# Altium PCB PCB1B.PcbDoc
Units mm, origin at the board's own origin, x right, y up, seen from the top; angles counter-clockwise.
Board outline 33.02 x 33.02 mm, 2 copper layers (Top Layer, Bottom Layer); 14 components, 12 nets, 65 pads, 2 vias.
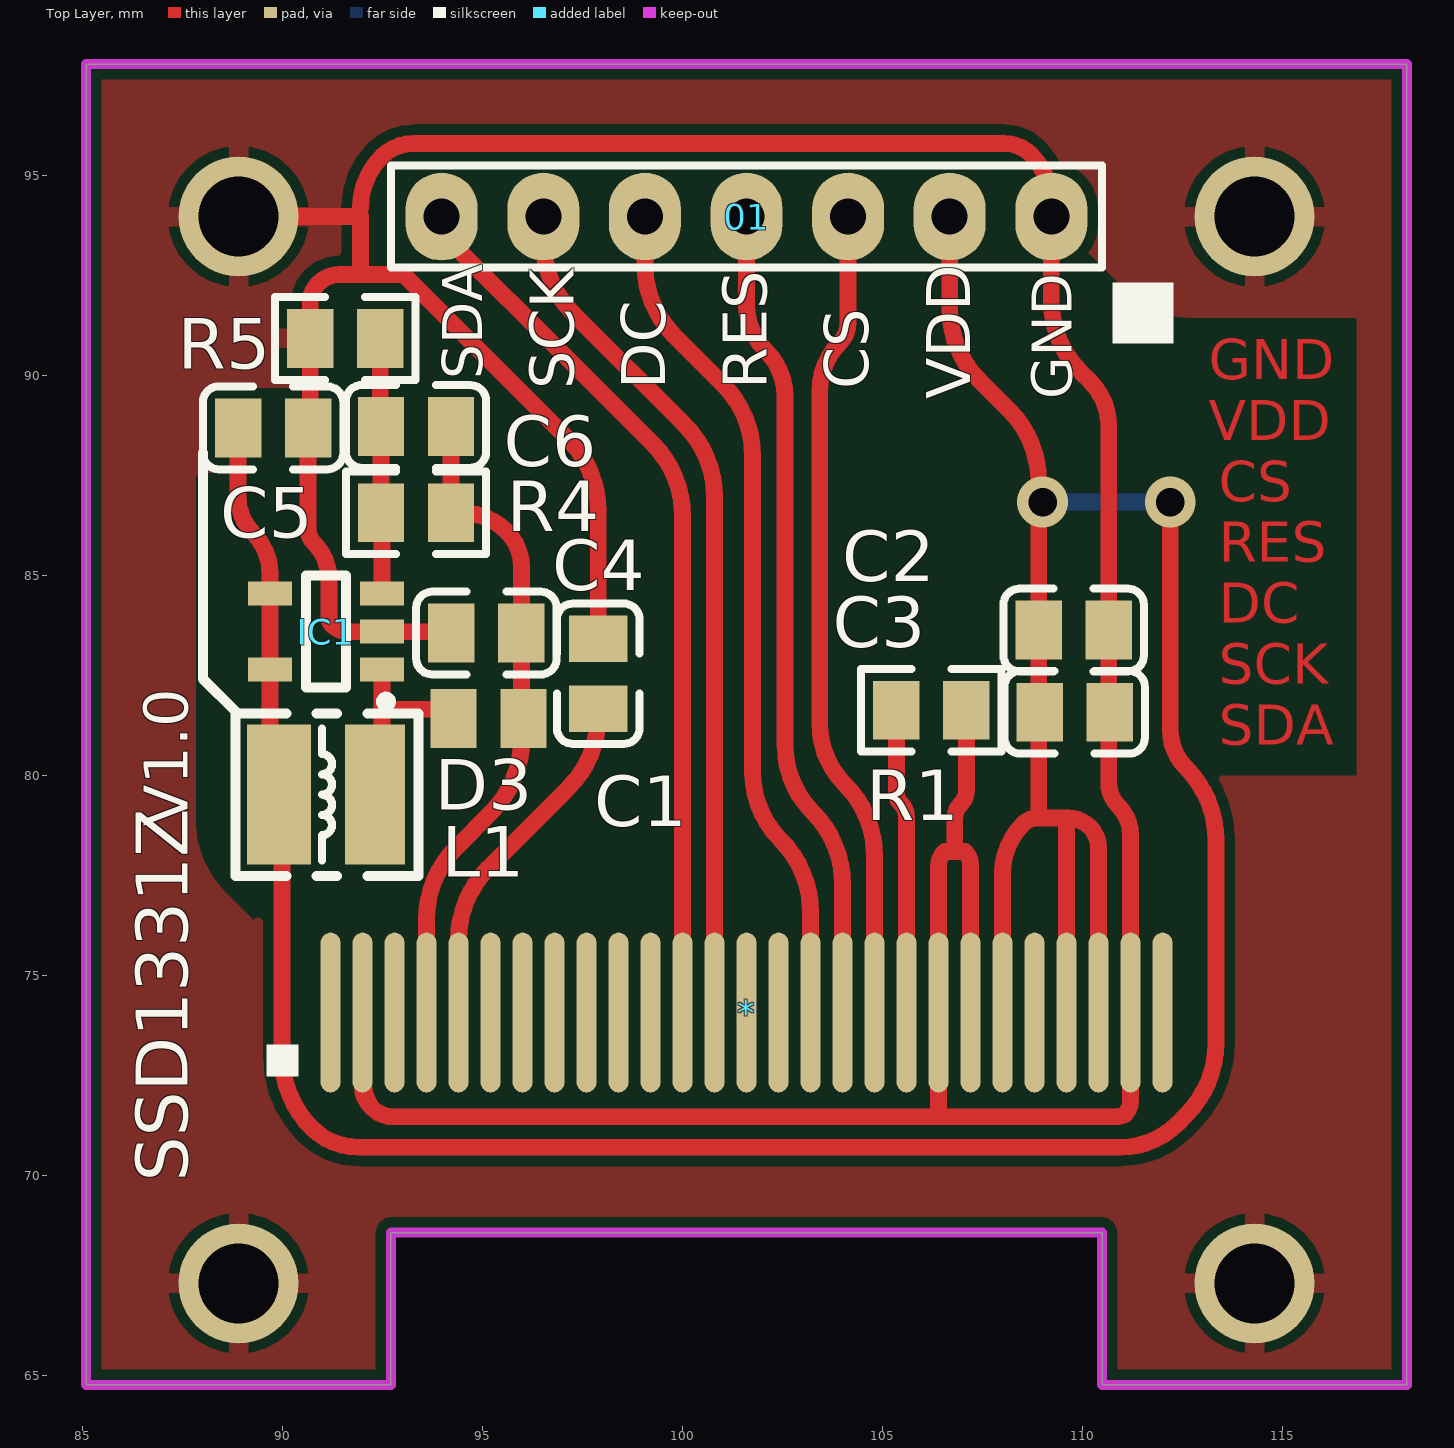
[diagram p0: Top Layer view]
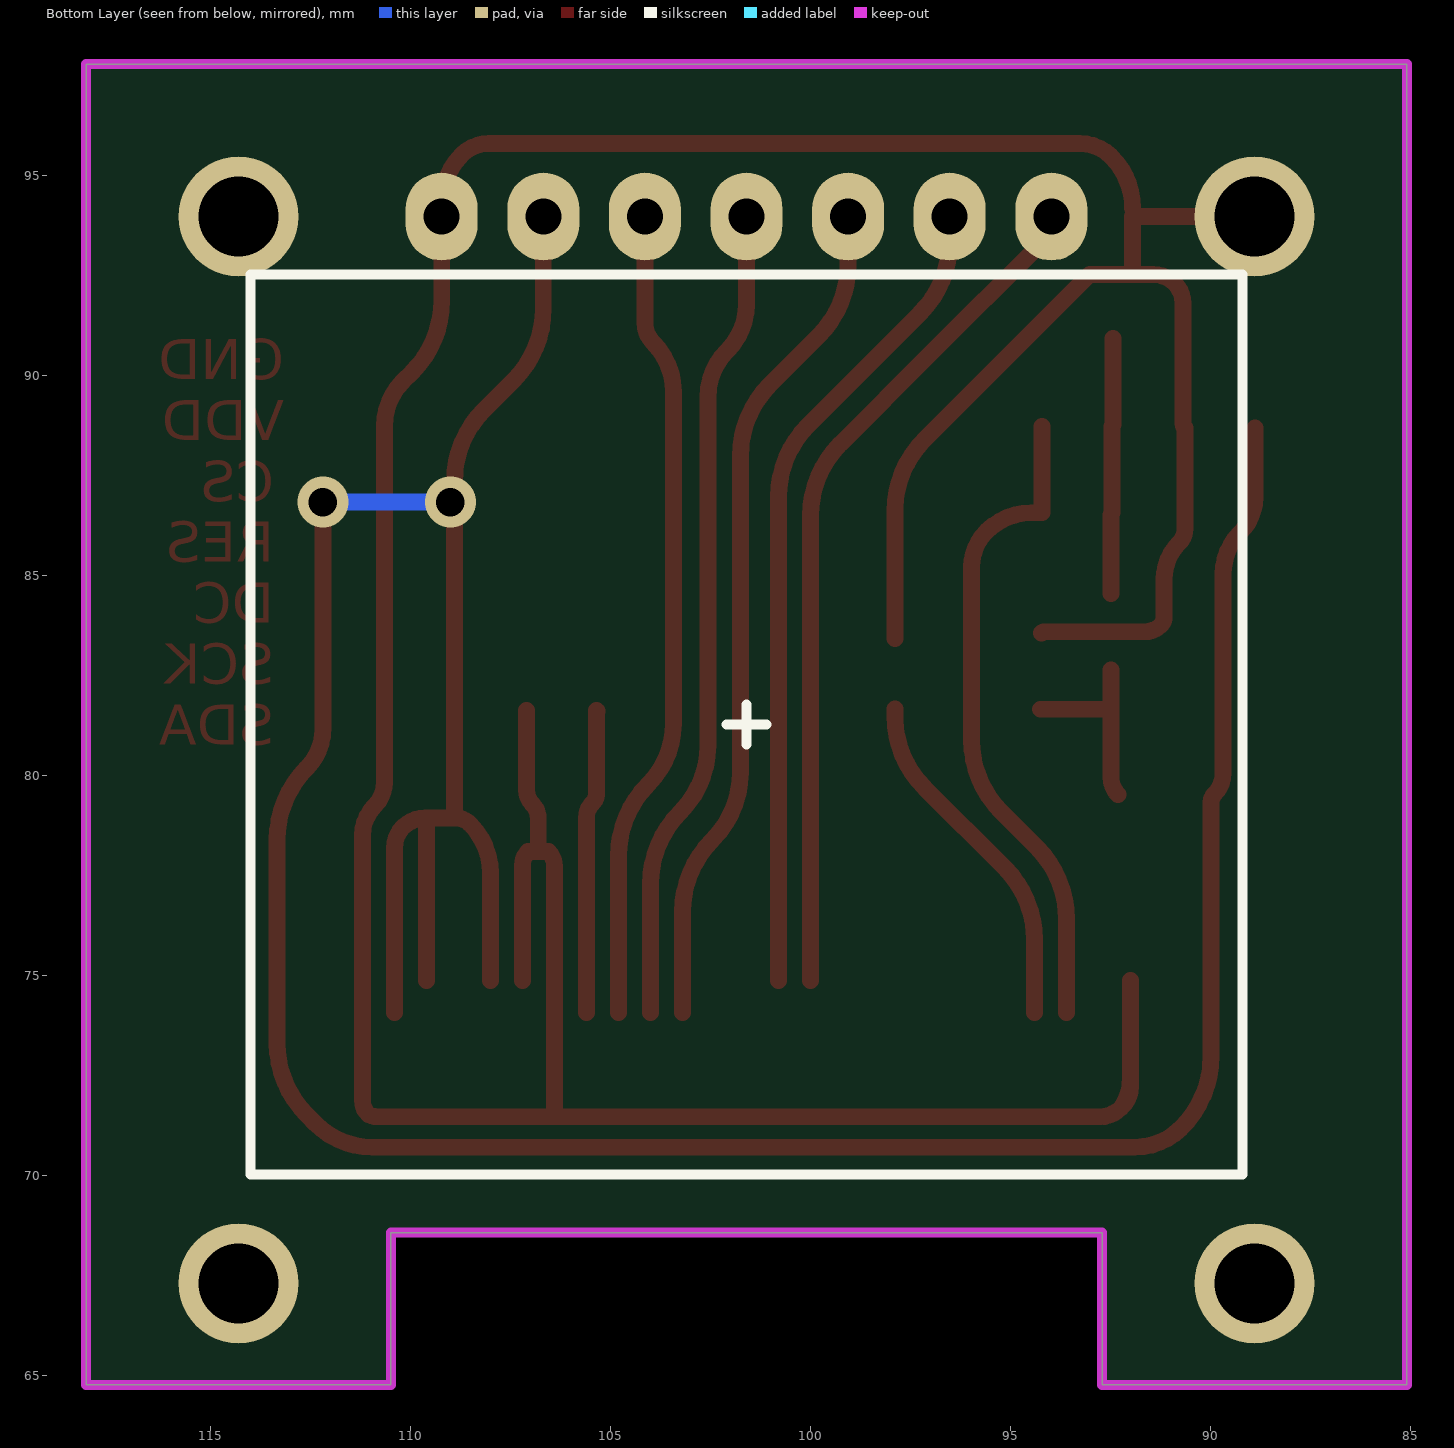
[diagram p1: Bottom Layer view, seen from below]
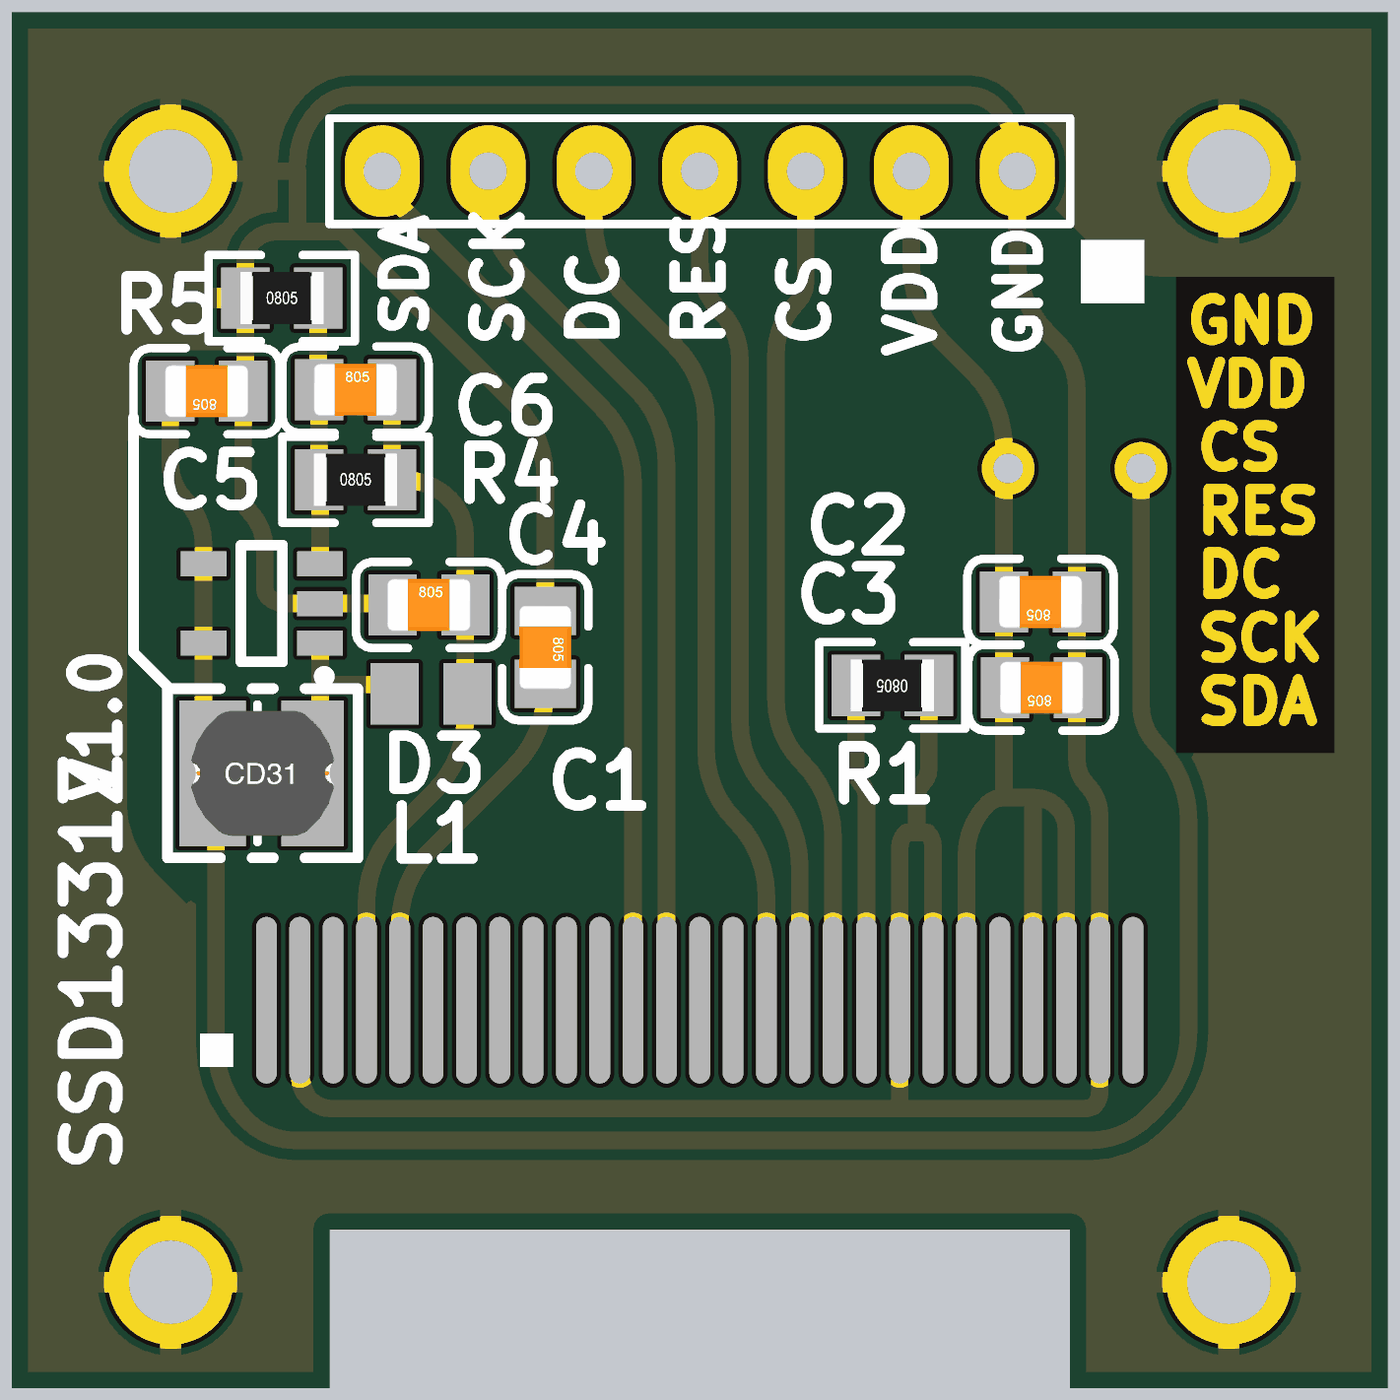
[diagram p2: 3D render of the assembled board from above, using the file's embedded part models]

## Layer stack, top to bottom
Top Solder: solder mask 0.0102, Solder Resist, Dk 3.5
Top Layer: signal copper 0.0356
Dielectric 1: dielectric 0.32, FR-4, Dk 4.8
Bottom Layer: signal copper 0.0356
Bottom Solder: solder mask 0.0102, Solder Resist, Dk 3.5

## Board outline
85.09,64.77 85.09,97.79 118.11,97.79 118.11,64.77 110.49,64.77 110.49,68.58 92.71,68.58 92.71,64.77

## Design rules (kind name [scope] priority, off if disabled: settings)
Clearance [All] p1: gap=0.254
ComponentClearance [All] p1 off: gap=0.254 collisioncheckmode=3 verticalgap=0.254 showdistances=FALSE
PlaneConnect [All] p1: planeconnectstyle=Relief reliefexpansion=0.508 reliefentries=4 reliefconductorwidth=0.5 reliefairgap=0.254
PolygonConnect [All] p1: connectstyle=Relief reliefconductorwidth=0.5 reliefentries=4 polygonreliefangle="90 Angle" airgapwidth=0.254
RoutingVias [All] p1: holewidth=0.711 width=1.27 viastyle="Through Hole" minholewidth=0.711 minwidth=1.27 maxholewidth=0.711 maxwidth=1.27
SolderMaskExpansion [All] p1: expansion=0.102
Width [All] p1: maxlimit=0.5 minlimit=0.42 preferedwidth=0.42
28 further rules are at their usual default settings.

## Classes and differential pairs
component class Sheet1: C1 C4 C5 C6 D3 IC1 L1 R1 R4 R5

## Components (designator, comment, footprint, x,y, rotation, side; value= is the part's Value field where it differs from the comment)
01 "Header 7" HDR1X7 109.22,93.98 r180 top locked
* "VGM096064A2F02" VGM096064A2F02 101.6,81.28 r0 top locked
C1 "Cap" LC-0805_C 97.892,82.55 r270 top
C2 "Cap" LC-0805_C 109.779,83.642 r180 top
C3 "Cap" LC-0805_C 109.804,81.585 r180 top
C4 "Cap" LC-0805_C 95.098,83.566 r0 top
C5 "Cap" LC-0805_C 89.764,88.697 r180 top
C6 "Cap" LC-0805_C 93.337,88.732 r0 top
D3 "SS24" LC-0805 95.148,81.432 r0 top
IC1 "PT1305" LC-SOT-23-5 91.087,83.602 r0 top
L1 "22uh" CD31 91.11,79.527 r0 top
R1 "Res2" LC-0805_R 106.223,81.636 r180 top
R4 "Res1" LC-0805_R 93.337,86.573 r0 top
R5 "Res1" LC-0805_R 91.567,90.932 r0 top

## Footprints (in the part's own frame and the unit in brackets; to place one, negate y for a bottom-side part, rotate by r counter-clockwise, add the part's x,y. Pads: shape width x height; smd on the part's side, far side on the other; paste and mask are expansions set on the pad)
CD31 [mm] "3.5*3*1mm（长宽高）"
  rect 1.6x3.5 smd: 1(-1.2,0)
  rect 1.5x3.5 smd: 2(1.2,0)
  silkscreen extent -2.29,-2.03 2.29,2.03, body extent -1.72,-1.5 1.72,1.5, height 1.2
HDR1X7 [mm] "Connector; Header; 7 Position"
  oval 1.8x2.2 hole 0.9: 1(0,0) 2(2.54,0) 3(5.08,0) 4(7.62,0) 5(10.16,0) 6(12.7,0) 7(15.24,0)
  silkscreen extent -1.27,-1.27 16.51,1.27
LC-0805 [mm]
  rect 1.16x1.47 smd: 1(-0.875,0) 2(0.875,0)
LC-0805_C [mm]
  rect 1.16x1.47 smd: 1(-0.875,0) 2(0.875,0)
  silkscreen extent -1.76,-1.04 1.76,1.04, body extent -1,-0.62 1,0.63, height 0.77
LC-0805_R [mm]
  rect 1.16x1.47 smd: 1(-0.875,0) 2(0.875,0)
  silkscreen extent -1.76,-1.04 1.76,1.03, body extent -1,-0.62 1,0.63, height 0.49
LC-SOT-23-5 [mm]
  rect 1.1x0.6 smd: 1(1.4,-0.95) 2(1.4,0) 3(1.4,0.95) 4(-1.4,0.95) 5(-1.4,-0.95)
  silkscreen extent -0.5,-1.87 1.63,1.4
VGM096064A2F02 [mm]
  oval 0.5x4 smd: 1(-10.4,-7.2) 2(-9.6,-7.2) 3(-8.8,-7.2) 4(-8,-7.2) 5(-7.2,-7.2) 6(-6.4,-7.2) 7(-5.6,-7.2) 8(-4.8,-7.2) 9(-4,-7.2) 10(-3.2,-7.2) 11(-2.4,-7.2) 12(-1.6,-7.2) 13(-0.8,-7.2) 14(0,-7.2) 15(0.8,-7.2) 16(1.6,-7.2) 17(2.4,-7.2) 18(3.2,-7.2) 19(4,-7.2) 20(4.8,-7.2) 21(5.6,-7.2) 22(6.4,-7.2) 23(7.2,-7.2) 24(8,-7.2) 25(8.8,-7.2) 26(9.6,-7.2) 27(10.4,-7.2)
  silkscreen extent -12,-8.8 -11.2,-8, body extent -12.4,-11.3 12.4,11.2, height 2

## Part data
01: "Header, 7-Pin"
C1 C2 C3 C4 C5 C6: "Capacitor"
D3: "肖特基二极管"
L1: library part Inductor
R1 R4 R5: "Resistor"

## Free pads (board coordinates)
  round 3 hole 2: 0(88.9,67.31) 0(88.9,93.98) 0(114.3,67.31) 0(114.3,93.98)

## Via types
v1: diameter 1.27, hole 0.711, Top Layer to Bottom Layer, 2 vias

## Nets (pads, with @x,y where several pads share a name; then routed paths per layer and width w, separated by ;. In a path a pad name is that pad's centre, name@x,y a point inside that pad or via, vN(x,y) a via of type N, cw(c..) or ccw(c..) an arc to the next point about the centre after c; other vN are vias at no path point)
CS: 01.3 *.18 | length 20.5
  Top Layer w0.42: 01.3 104.14,91.321 cw(c103.446,91.321) 103.937,90.83 ccw(c105.163,89.604) 103.429,89.604 103.429,81.303 ccw(c105.57,81.303) 104.056,79.789 cw(c102.26,77.993) 104.8,77.993 *.18
DC: 01.5 *.16 | length 21.2
  Top Layer w0.42: 01.5 99.06,92.785 ccw(c101.6,92.785) 99.804,90.989 101.008,89.784 cw(c99.212,87.988) 101.752,87.988 101.752,80.091 ccw(c104.155,80.091) 102.456,78.392 cw(c100.66,76.596) 103.2,76.596 *.16
GND: 01.1 *.2 *.20 *.21 *.26 C1.1 C2.1 C3.1 C4.1 C5.1 IC1.2 pad.0 R1.1 R5.1 | length 108.8
  Top Layer w0.42: pad.0@88.9,93.98 91.737,93.98 ; 91.948,93.98 91.948,92.532 ; 91.948,94.191 cw(c93.769,94.191) 92.481,95.479 cw(c93.279,94.681) 93.279,95.809 108.037,95.809 cw(c108.037,94.855) 108.712,95.529 cw(c107.486,94.303) 109.22,94.303 01.1 109.22,91.883 ccw(c111.76,91.883) 109.964,90.086 110.185,89.865 cw(c109.054,88.734) 110.654,88.734 C2.1 110.654,79.834 ccw(c111.482,79.834) 110.896,79.248 cw(c110.163,78.515) 111.2,78.515 *.26 111.2,71.875 cw(c110.715,71.875) 111.058,71.533 cw(c110.815,72.019) 110.815,71.476 106.4,71.476 ; *.2@92,74.88 *.2@92,72.454 ; C4.1 ccw(c94.137,83.48) 94.137,83.602 IC1.2 91.641,83.602 cw(c91.641,84.174) 91.237,83.769 cw(c91.421,83.953) 91.161,83.953 91.161,84.907 ccw(c89.86,84.907) 90.78,85.827 cw(c91.12,86.167) 90.639,86.167 C5.1 ccw(c90.51,88.826) 90.692,88.826 R5.1 90.692,91.832 cw(c91.358,91.832) 90.887,92.304 cw(c91.439,91.752) 91.439,92.532 91.948,92.532 ; C1.1 97.892,86.61 ccw(c95.352,86.61) 97.148,88.406 93.022,92.532 91.948,92.532 ; R1.1 107.098,79.633 cw(c106.625,79.633) 106.959,79.299 ccw(c107.327,78.931) 106.807,78.931 106.807,78.105 ; *.21@107.2,74.88 107.2,77.769 ccw(c106.725,77.769) 107.061,78.105 106.807,78.105 ; *.2@92,72.454 ccw(c93.383,72.454) 92.197,71.742 ; *.2@92,72.454 92,72.218 ccw(c92.673,72.218) 92.197,71.742 ; 92.197,71.742 92.253,71.686 ccw(c92.761,72.193) 92.761,71.476 106.4,71.476 ; 106.4,71.476 *.20 106.4,77.736 cw(c106.922,77.736) 106.553,78.105 106.807,78.105
Net*_5: *.5 C1.2 | length 8.8
  Top Layer w0.42: *.5 94.4,75.898 cw(c96.94,75.898) 95.144,77.694 97.148,79.698 ccw(c95.352,81.494) 97.892,81.494 C1.2
Net*_19: *.19 R1.2 | length 7.7
  Top Layer w0.42: R1.2@105.334,81.602 cw(c105.382,81.602) R1.2 105.348,79.572 ccw(c105.734,79.572) 105.461,79.299 cw(c105.125,78.963) 105.6,78.963 *.19
NetC6_1: C6.1 IC1.3 R4.1 R5.2 | length 6.4
  Top Layer w0.42: R5.2 92.442,88.78 ccw(c92.509,88.78) C6.1 R4.1 cw(c92.399,86.511) 92.487,86.511 IC1.3
NetD3_1: D3.1 IC1.1 L1.2 | length 5
  Top Layer w0.42: L1.2 ccw(c91.881,79.956) 92.487,79.956 92.487,81.636 cw(c92.549,81.574) 92.549,81.661 ; IC1.1 92.487,81.661 D3.1@94.248,81.661
RES: 01.4 *.17 | length 20.5
  Top Layer w0.42: 01.4 101.6,91.792 ccw(c103.248,91.792) 102.083,90.627 cw(c100.917,89.462) 102.565,89.462 102.565,80.758 ccw(c104.924,80.758) 103.256,79.091 cw(c101.46,77.294) 104,77.294 *.17
SCK: 01.6 *.13 | length 20.7
  Top Layer w0.42: 01.6 96.52,93.356 ccw(c99.06,93.356) 97.264,91.56 100.056,88.768 cw(c98.26,86.971) 100.8,86.971 *.13@100.8,74.88
SDA: 01.7 *.12 | length 21.4
  Top Layer w0.42: 01.7 ccw(c94.961,93.98) 94.267,93.286 97.013,90.541 ; 97.014,90.54 99.256,88.298 cw(c97.46,86.501) 100,86.501 *.12@100,74.88
VCC3.3: 01.2 *.22 *.24 *.25 C2.2 C3.2 C5.2 IC1.4 IC1.5 L1.1 | length 89.6
  Top Layer w0.42: C5.2 88.889,86.967 ccw(c90.142,86.967) 89.256,86.081 cw(c88.213,85.038) 89.687,85.038 IC1.4 IC1.5 89.687,80.064 ccw(c90.447,80.064) L1.1 cw(c89.726,79.343) 89.986,79.343 89.986,72.991 ccw(c92.526,72.991) 90.73,71.195 ccw(c91.892,72.357) 91.892,70.714 110.959,70.714 ccw(c110.959,72.708) 112.37,71.298 112.591,71.519 ccw(c110.795,73.315) 113.335,73.315 113.335,78.399 ccw(c110.795,78.399) 112.591,80.195 cw(c113.554,81.159) 112.192,81.159 v1(112.192,86.843) ; 01.2 106.68,91.679 ccw(c109.22,91.679) 107.424,89.883 108.16,89.147 cw(c106.364,87.351) 108.904,87.351 v1@108.904,86.868 ; *.22@108,74.88 108,77.562 cw(c109.737,77.562) 108.509,78.791 cw(c108.877,78.423) 108.568,78.842 cw(c108.877,78.423) 108.877,78.943 109.633,78.943 cw(c109.633,78.163) 110.185,78.715 cw(c109.667,78.196) 110.4,78.196 *.25 ; 108.904,78.943 C2.2 v1@108.904,86.843 ; v1@108.941,86.868 ccw(c109.002,86.929) v1(109.002,86.843) ; *.24@109.6,74.88 109.6,78.892
  Bottom Layer w0.42: v1(109.002,86.843) v1(112.192,86.843)
VCC12V: *.4 C4.2 C6.2 D3.2 R4.2 | length 16.6
  Top Layer w0.42: *.4 93.6,76.414 cw(c96.14,76.414) 94.344,78.21 95.229,79.095 ccw(c93.433,80.891) 95.671,79.69 ccw(c93.433,80.891) 95.973,80.891 C4.2 95.973,85.22 ccw(c94.72,85.22) 95.606,86.106 ccw(c94.477,84.978) 94.477,86.573 R4.2 C6.2
pads on no net: *.1 *.3 *.6 *.7 *.8 *.9 *.10 *.11 *.14 *.15 *.23 *.27

## Polygon pours and split planes (outlines as drawn)
GND on Top Layer "Top Layer-No Net" (solid, remove dead copper, pour order 14): 85.09,97.79 85.09,64.77 118.11,64.77 118.11,97.79

## Keep-outs
Keep-Out Layer:
  the board outline again, w0.254

## Other copper
Top Layer:
  pour cut-out: 113.03,91.44 113.03,80.01 116.84,80.01 116.84,91.44
  pour cut-out: 87.849,87.502 87.849,78.888 ccw(c90.389,78.888) 88.593,77.092 89.281,76.403 cw(c89.465,76.219) 89.465,76.479 90.373,76.479 90.373,86.472 cw(c92.801,86.472) 91.084,88.189
  pour cut-out: 90.17,88.9 90.17,73.66 91.658,73.66 cw(c91.658,71.12) 93.454,72.916 95.25,71.12 97.046,72.916 cw(c98.842,71.12) 98.842,73.66 111.76,73.66 111.76,85.308 cw(c114.3,85.308) 112.504,87.104 113.03,87.63 113.03,91.44 112.812,91.44 cw(c112.812,93.98) 111.016,92.184 109.22,93.98
  text "GND" at 113.157,89.916 h1
  text "VDD" at 113.157,88.392 h1
  text "CS" at 113.411,86.868 h1
  text "RES" at 113.411,85.344 h1
  text "DC" at 113.411,83.82 h1
  text "SCK" at 113.411,82.296 h1
  text "SDA" at 113.411,80.772 h1

## Silkscreen, mask and mechanical layers (free items; w line width, h text height)
Top Overlay:
  rectangle: 110.744,90.805 112.268,92.329
  lines w0.254: 88.009,88.062 88.009,82.425 88.824,81.61 88.824,81.559
  text "SDA" at 94.996,89.916 h1 r90
  text "SCK" at 97.282,89.662 h1.1 r90
  text "DC" at 99.568,89.662 h1.1 r90
  text "RES" at 102.108,89.662 h1.1 r90
  text "CS" at 104.648,89.662 h1.1 r90
  text "VDD" at 107.188,89.408 h1.1 r90
  text "GND" at 109.728,89.408 h1 r90
  text "V1.0" at 87.63,78.74 h1.1 r90
  text "SSD1331Z" at 87.63,69.85 h1.3 r90
Top Solder:
  rectangle: 113.03,80.01 116.84,91.44